# Altium PCB zhernakov_pwron_circuit.PcbDoc (part 1 of 2)
Units mm, origin at the board's own origin, x right, y up, seen from the top; angles counter-clockwise.
Board outline 108 x 46 mm, 2 copper layers (Top Layer, Bottom Layer), stack 1.57 mm thick; 57 components, 33 nets, 171 pads, 151 vias.
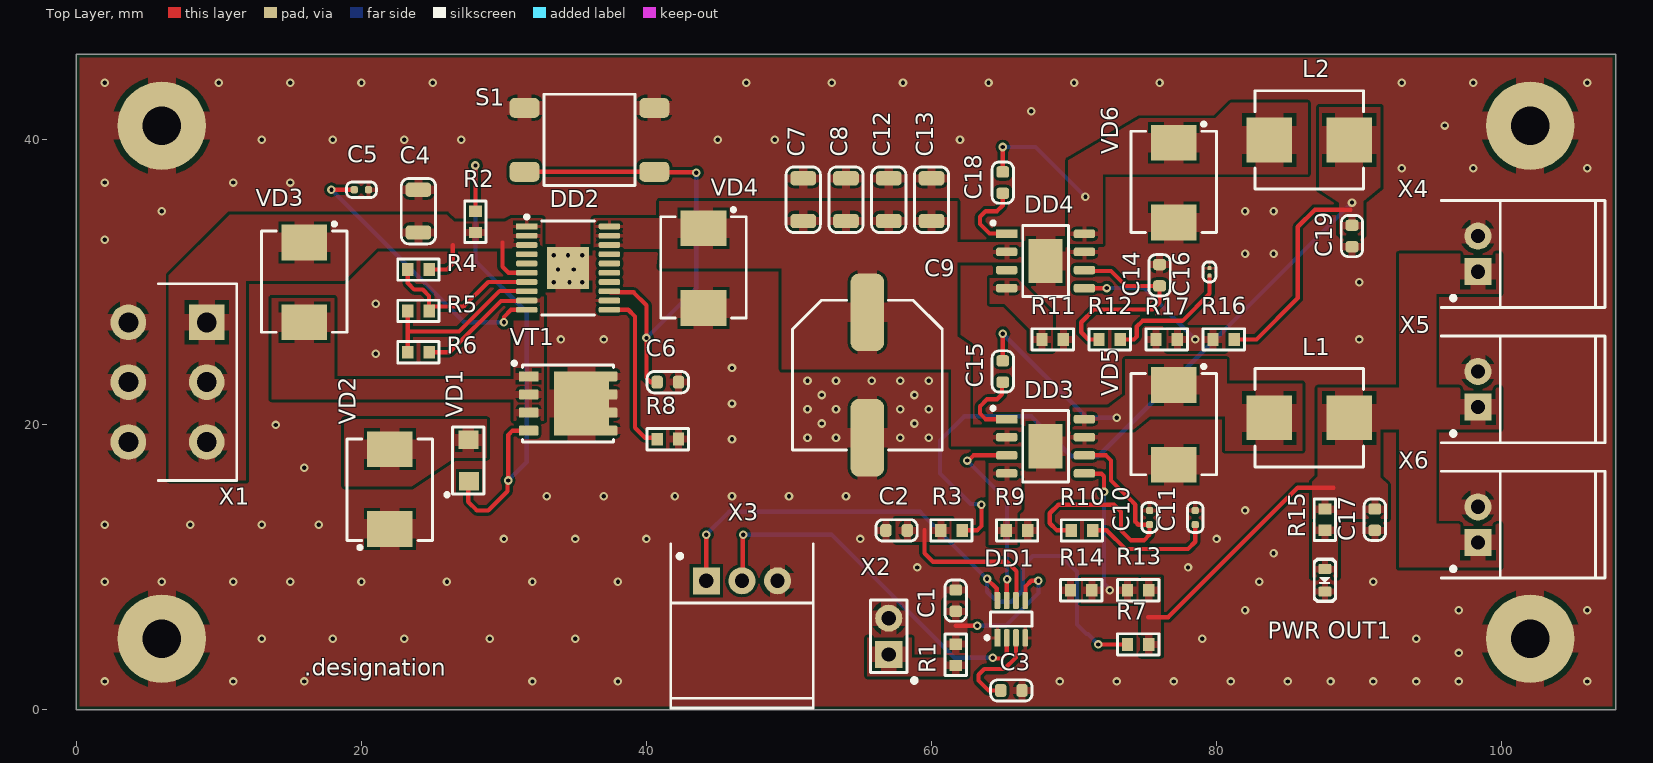
[diagram p0: Top Layer view]
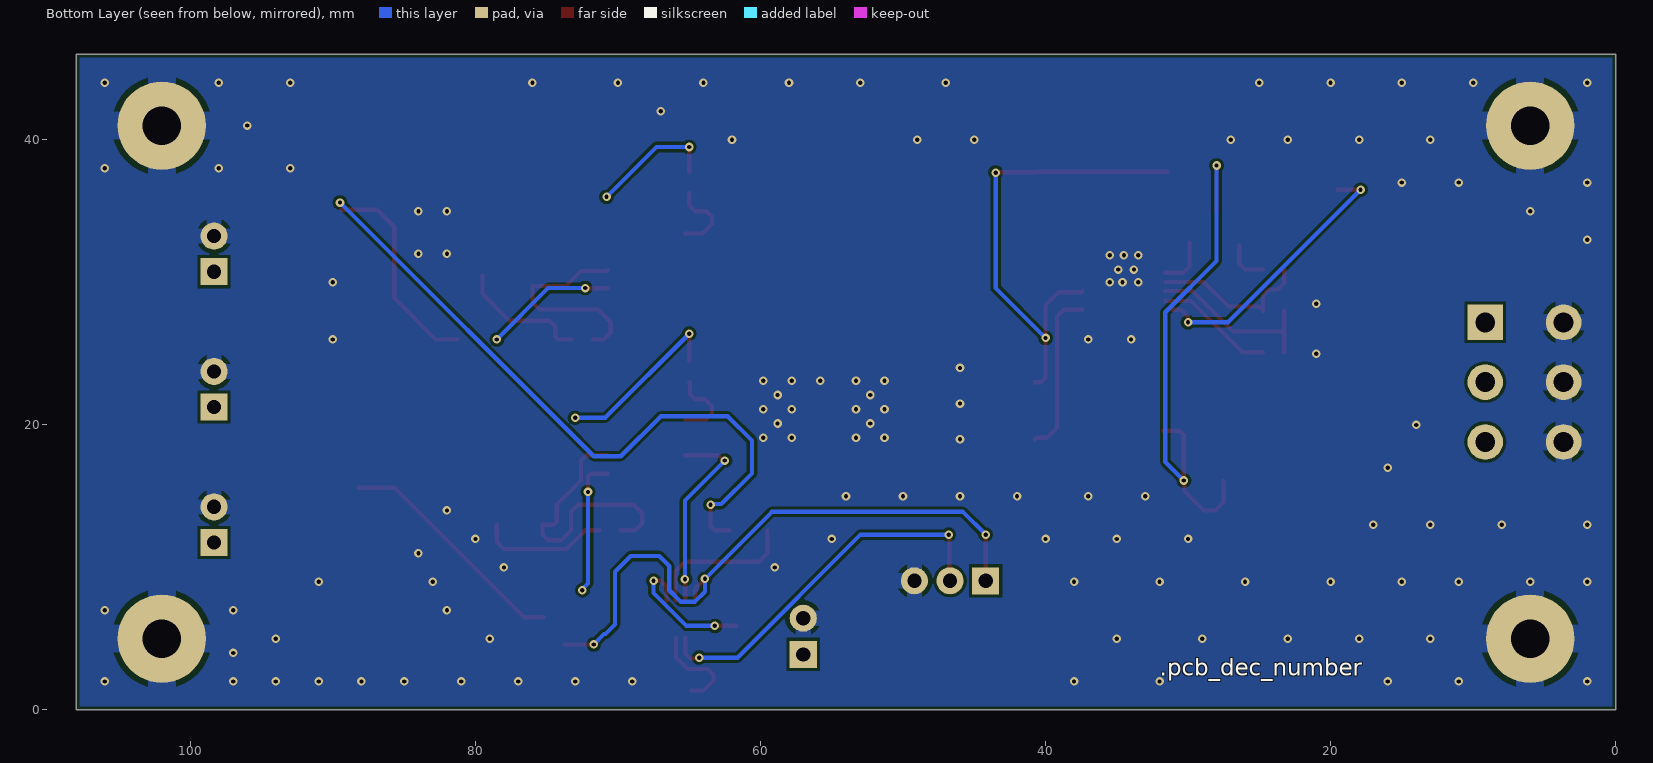
[diagram p1: Bottom Layer view, seen from below]
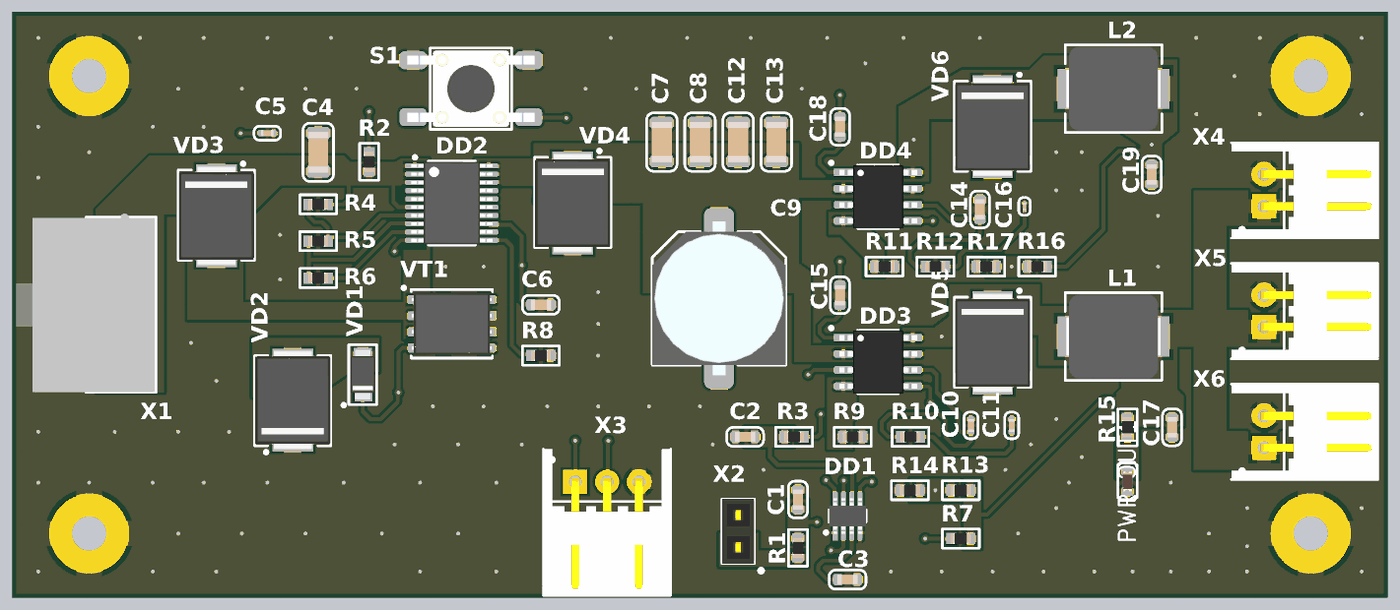
[diagram p2: 3D render of the assembled board from above, using the file's embedded part models]

## Layer stack, top to bottom
Top Solder: solder mask 0.0102, Solder Resist, Dk 3.5
Top Layer: signal copper 0.035
Core 1: core 1.5, FR4, Dk 4.6
Bottom Layer: signal copper 0.035
Bottom Solder: solder mask 0.0102, Solder Resist, Dk 3.5

## Board outline
0,0 108,0 108,46 0,46

## Design rules (kind name [scope] priority, off if disabled: settings)
AcuteAngle min_acute_angle [OnCopper] p1: minimum=3.50000000000000E+0001 checktracksonly=FALSE // Минимальный угол между примитивами топологии
BoardOutlineClearance board_outline_clearance_std [NOT (OnLayer('Bottom Overlay') OR OnLayer('Top Overlay'))] p1: gap=0.25 ignorepadtopadclearanceinfootprint=FALSE except(0: Arc-SplitContinuation Track-SplitContinuation SMDPad-SplitContinuation THPad-SplitContinuation Via-SplitContinuation Fill-SplitContinuation Poly-SplitContinuation Region-SplitContinuation Text-SplitContinuation) // Отступ элементов топологии от края фрезеруемой печатной платы
Clearance clearance_outer_35um_std [OnTopLayer OR OnBottomLayer] p1: gap=0.2 ignorepadtopadclearanceinfootprint=TRUE except(0.25: Arc-Hole Track-Hole SMDPad-Hole THPad-Hole Via-Hole Fill-Hole Poly-Hole Region-Hole Text-Hole) // Зазоры на внешних слоях
Clearance clearance_inner_35um_std [NOT (OnTopLayer Or OnBottomLayer)] p2: gap=0.2 ignorepadtopadclearanceinfootprint=FALSE except(0.25: Arc-Hole Track-Hole SMDPad-Hole THPad-Hole Via-Hole Fill-Hole Poly-Hole Region-Hole Text-Hole) // Зазоры на внутренних слоях
ComponentClearance [All] p1: gap=0 collisioncheckmode=3 verticalgap=0 showdistances=FALSE
DiffPairsRouting diff_pairs_routing [All] p1: maxlimit=0.127 minlimit=0.127 mostfreqgap=0.127 toplayer_minwidth=0.143 toplayer_maxwidth=0.143 toplayer_prefwidth=0.143 bottomlayer_minwidth=0.143 bottomlayer_maxwidth=0.143 bottomlayer_prefwidth=0.143 impedanceprofiledriven=TRUE impedanceprofileid={FD46899E-B5A2-4EF5-A302-5D2DB6A51F35} maxuncoupledlength=12.7 // Правила трассировки дифференциальных пар
HoleSize min_hole_size_std [IsPad] p1: absolutevalues=TRUE maxlimit=5.9 minlimit=0.6 maxpercent=80.000 minpercent=20.000 // Диаметр межслойного переходного отверстия
HoleSize min_hole_size_via_std [IsVia] p2: absolutevalues=TRUE maxlimit=5.9 minlimit=0.3 maxpercent=80.000 minpercent=20.000 // Минимальный диаметр монтажного отверстия
HoleToHoleClearance hole_to_hole_clearance_std [All] p1: gap=0.2 allowstackedmicrovias=FALSE // Минимальное расстояние между краями двух отверстий
MinimumAnnularRing min_via_ar_std [All] p1: minimumring=0.15 // Поясок площадки переходного отверстия (Annular ring VIA)
MinimumAnnularRing min_pad_ar_std [All] p2: minimumring=0.2 // Поясок монтажной контактной площадки (Annular ring PAD)
MinimumSolderMaskSliver min_solder_mask_bridge_std [All] p1: minsoldermaskwidth=0.15 // Мнимальная ширина масочного мостика
PlaneClearance plane_clearance_35um_std [All] p1: clearance=0.2 // Отступ полигона (для слоя plane) от элементов топологии
PlaneConnect [All] p1: planeconnectstyle=Relief reliefexpansion=0.5 reliefentries=4 reliefconductorwidth=0.2 reliefairgap=0.2
PolygonConnect poly_connect_to_pad<=0.3 [(AsMM(PadXSize_AllLayers)<=0.301) or (AsMM(PadYSize_AllLayers)<=0.301)] p1: thpad.connectstyle=Relief thpad.reliefconductorwidth=0.2 thpad.reliefentries=4 thpad.polygonreliefangle="90 Angle" thpad.airgapwidth=0.2 smdpad.connectstyle=Relief smdpad.reliefconductorwidth=0.2 smdpad.reliefentries=4 smdpad.polygonreliefangle="90 Angle" smdpad.airgapwidth=0.2 via.connectstyle=Direct via.reliefconductorwidth=0.254 via.reliefentries=4 via.polygonreliefangle="90 Angle" via.airgapwidth=0.254 // Правила подключения полигонов для падов от 0,3мм и меньше
PolygonConnect poly_connect_to_pad<=0.4 [(AsMM(PadXSize_AllLayers)<=0.401) or (AsMM(PadYSize_AllLayers)<=0.401)] p2: thpad.connectstyle=Relief thpad.reliefconductorwidth=0.26 thpad.reliefentries=4 thpad.polygonreliefangle="90 Angle" thpad.airgapwidth=0.2 smdpad.connectstyle=Relief smdpad.reliefconductorwidth=0.26 smdpad.reliefentries=4 smdpad.polygonreliefangle="90 Angle" smdpad.airgapwidth=0.2 via.connectstyle=Direct via.reliefconductorwidth=0.254 via.reliefentries=4 via.polygonreliefangle="90 Angle" via.airgapwidth=0.254 // Правила подключения полигонов для падов от 0,4 и меньше
PolygonConnect poly_connect_to_pad<=0.6 [(AsMM(PadXSize_AllLayers)<=0.601) or (AsMM(PadYSize_AllLayers)<=0.601)] p3: thpad.connectstyle=Relief thpad.reliefconductorwidth=0.33 thpad.reliefentries=4 thpad.polygonreliefangle="90 Angle" thpad.airgapwidth=0.2 smdpad.connectstyle=Relief smdpad.reliefconductorwidth=0.33 smdpad.reliefentries=4 smdpad.polygonreliefangle="90 Angle" smdpad.airgapwidth=0.2 via.connectstyle=Direct via.reliefconductorwidth=0.254 via.reliefentries=4 via.polygonreliefangle="90 Angle" via.airgapwidth=0.254 // Правила подключения полигонов для падов от 0,6мм и меньше
PolygonConnect poly_connect_to_pad<=0.7 [(AsMM(PadXSize_AllLayers)<=0.701) or (AsMM(PadYSize_AllLayers)<=0.701)] p4: thpad.connectstyle=Relief thpad.reliefconductorwidth=0.46 thpad.reliefentries=4 thpad.polygonreliefangle="90 Angle" thpad.airgapwidth=0.2 smdpad.connectstyle=Relief smdpad.reliefconductorwidth=0.46 smdpad.reliefentries=4 smdpad.polygonreliefangle="90 Angle" smdpad.airgapwidth=0.2 via.connectstyle=Direct via.reliefconductorwidth=0.254 via.reliefentries=4 via.polygonreliefangle="90 Angle" via.airgapwidth=0.254 // Правила подключения полигонов для падов от 0,7мм и меньше
PolygonConnect poly_connect_to_pad<=0.8 [(AsMM(PadXSize_AllLayers)<=0.8)or(AsMM(PadYSize_AllLayers)<=0.8)] p5: thpad.connectstyle=Relief thpad.reliefconductorwidth=0.53 thpad.reliefentries=4 thpad.polygonreliefangle="90 Angle" thpad.airgapwidth=0.3 smdpad.connectstyle=Relief smdpad.reliefconductorwidth=0.53 smdpad.reliefentries=4 smdpad.polygonreliefangle="90 Angle" smdpad.airgapwidth=0.2 via.connectstyle=Direct via.reliefconductorwidth=0.254 via.reliefentries=4 via.polygonreliefangle="90 Angle" via.airgapwidth=0.254 // Правила подключения полигонов для падов от 0,8мм и меньше
PolygonConnect poly_connect_to_pad<=1 [(AsMM(PadXSize_AllLayers)<=1.01)or(AsMM(PadYSize_AllLayers)<=1.01)] p6: thpad.connectstyle=Relief thpad.reliefconductorwidth=0.6 thpad.reliefentries=4 thpad.polygonreliefangle="90 Angle" thpad.airgapwidth=0.3 smdpad.connectstyle=Relief smdpad.reliefconductorwidth=0.6 smdpad.reliefentries=4 smdpad.polygonreliefangle="90 Angle" smdpad.airgapwidth=0.2 via.connectstyle=Direct via.reliefconductorwidth=0.254 via.reliefentries=4 via.polygonreliefangle="90 Angle" via.airgapwidth=0.254 // Правила подключения полигонов для падов от 1мм и меньше
PolygonConnect poly_connect_to_pad<=1.3 [(AsMM(PadXSize_AllLayers)<=1.31)or(AsMM(PadYSize_AllLayers)<=1.31)] p7: thpad.connectstyle=Relief thpad.reliefconductorwidth=0.66 thpad.reliefentries=4 thpad.polygonreliefangle="90 Angle" thpad.airgapwidth=0.3 smdpad.connectstyle=Relief smdpad.reliefconductorwidth=0.86 smdpad.reliefentries=4 smdpad.polygonreliefangle="90 Angle" smdpad.airgapwidth=0.2 via.connectstyle=Direct via.reliefconductorwidth=0.254 via.reliefentries=4 via.polygonreliefangle="90 Angle" via.airgapwidth=0.254 // Правила подключения полигонов для падов от 1,3мм и меньше
PolygonConnect poly_connect_to_pad<=1.6 [(AsMM(PadXSize_AllLayers)<=1.61)or(AsMM(PadYSize_AllLayers)<=1.61)] p8: thpad.connectstyle=Relief thpad.reliefconductorwidth=0.8 thpad.reliefentries=4 thpad.polygonreliefangle="90 Angle" thpad.airgapwidth=0.3 smdpad.connectstyle=Relief smdpad.reliefconductorwidth=1 smdpad.reliefentries=4 smdpad.polygonreliefangle="90 Angle" smdpad.airgapwidth=0.2 via.connectstyle=Direct via.reliefconductorwidth=0.254 via.reliefentries=4 via.polygonreliefangle="90 Angle" via.airgapwidth=0.254 // Правила подключения полигонов для падов от 1,6мм и меньше
PolygonConnect poly_connect_to_pad<=1.8 [(AsMM(PadXSize_AllLayers)<=1.8)or(AsMM(PadYSize_AllLayers)<=1.8)] p9: thpad.connectstyle=Relief thpad.reliefconductorwidth=1 thpad.reliefentries=4 thpad.polygonreliefangle="90 Angle" thpad.airgapwidth=0.3 smdpad.connectstyle=Relief smdpad.reliefconductorwidth=1.2 smdpad.reliefentries=4 smdpad.polygonreliefangle="90 Angle" smdpad.airgapwidth=0.2 via.connectstyle=Direct via.reliefconductorwidth=0.254 via.reliefentries=4 via.polygonreliefangle="90 Angle" via.airgapwidth=0.254 // Правила подключения полигонов для падов от 1,8мм и меньше
PolygonConnect poly_connect_to_pad<=2 [(AsMM(PadXSize_AllLayers)<=2.01)or(AsMM(PadYSize_AllLayers)<=2.01)] p10: thpad.connectstyle=Relief thpad.reliefconductorwidth=1.1 thpad.reliefentries=4 thpad.polygonreliefangle="90 Angle" thpad.airgapwidth=0.3 smdpad.connectstyle=Relief smdpad.reliefconductorwidth=1.4 smdpad.reliefentries=4 smdpad.polygonreliefangle="90 Angle" smdpad.airgapwidth=0.2 via.connectstyle=Direct via.reliefconductorwidth=0.254 via.reliefentries=4 via.polygonreliefangle="90 Angle" via.airgapwidth=0.254 // Правила подключения полигонов для падов от 2мм и меньше
PolygonConnect poly_connect_to_pad<=2.3 [(AsMM(PadXSize_AllLayers)<=2.31)or(AsMM(PadYSize_AllLayers)<=2.31)] p11: thpad.connectstyle=Relief thpad.reliefconductorwidth=1.2 thpad.reliefentries=4 thpad.polygonreliefangle="90 Angle" thpad.airgapwidth=0.3 smdpad.connectstyle=Relief smdpad.reliefconductorwidth=1.4 smdpad.reliefentries=4 smdpad.polygonreliefangle="90 Angle" smdpad.airgapwidth=0.2 via.connectstyle=Direct via.reliefconductorwidth=0.254 via.reliefentries=4 via.polygonreliefangle="90 Angle" via.airgapwidth=0.254 // Правила подключения полигонов для падов от 2,3мм и меньше
PolygonConnect poly_connect_to_pad<=2.5 [(AsMM(PadXSize_AllLayers)<=2.51)or(AsMM(PadYSize_AllLayers)<=2.51)] p12: thpad.connectstyle=Relief thpad.reliefconductorwidth=1.2 thpad.reliefentries=4 thpad.polygonreliefangle="90 Angle" thpad.airgapwidth=0.3 smdpad.connectstyle=Relief smdpad.reliefconductorwidth=1.4 smdpad.reliefentries=4 smdpad.polygonreliefangle="90 Angle" smdpad.airgapwidth=0.2 via.connectstyle=Direct via.reliefconductorwidth=0.254 via.reliefentries=4 via.polygonreliefangle="90 Angle" via.airgapwidth=0.254 // Правила подключения полигонов для падов от 2,5мм и меньше
PolygonConnect poly_connect_to_pad<=2.7 [(AsMM(PadXSize_AllLayers)<=2.71)or(AsMM(PadYSize_AllLayers)<=2.71)] p13: thpad.connectstyle=Relief thpad.reliefconductorwidth=1.4 thpad.reliefentries=4 thpad.polygonreliefangle="90 Angle" thpad.airgapwidth=0.3 smdpad.connectstyle=Relief smdpad.reliefconductorwidth=1.6 smdpad.reliefentries=4 smdpad.polygonreliefangle="90 Angle" smdpad.airgapwidth=0.2 via.connectstyle=Direct via.reliefconductorwidth=0.254 via.reliefentries=4 via.polygonreliefangle="90 Angle" via.airgapwidth=0.254 // Правила подключения полигонов для падов от 2,7мм и меньше
PolygonConnect poly_connect_to_pad<=3 [(AsMM(PadXSize_AllLayers)<=3.01)or(AsMM(PadYSize_AllLayers)<=3.01)] p14: thpad.connectstyle=Relief thpad.reliefconductorwidth=1.6 thpad.reliefentries=4 thpad.polygonreliefangle="90 Angle" thpad.airgapwidth=0.3 smdpad.connectstyle=Relief smdpad.reliefconductorwidth=1.8 smdpad.reliefentries=4 smdpad.polygonreliefangle="90 Angle" smdpad.airgapwidth=0.2 via.connectstyle=Direct via.reliefconductorwidth=0.254 via.reliefentries=4 via.polygonreliefangle="90 Angle" via.airgapwidth=0.254 // Правила подключения полигонов для падов от 3мм и меньше
PolygonConnect poly_connect_to_pad<=7 [(AsMM(PadXSize_AllLayers)<7.01)or(AsMM(PadYSize_AllLayers)<=7.01)] p15: thpad.connectstyle=Relief thpad.reliefconductorwidth=2 thpad.reliefentries=4 thpad.polygonreliefangle="90 Angle" thpad.airgapwidth=0.4 smdpad.connectstyle=Relief smdpad.reliefconductorwidth=2 smdpad.reliefentries=4 smdpad.polygonreliefangle="90 Angle" smdpad.airgapwidth=0.3 via.connectstyle=Direct via.reliefconductorwidth=0.254 via.reliefentries=4 via.polygonreliefangle="90 Angle" via.airgapwidth=0.254 // Правила подключения полигонов для падов от 7мм и меньше
PolygonConnect poly_connect_to_pad [All] p16: thpad.connectstyle=Relief thpad.reliefconductorwidth=0.25 thpad.reliefentries=4 thpad.polygonreliefangle="90 Angle" thpad.airgapwidth=0.2 smdpad.connectstyle=Relief smdpad.reliefconductorwidth=0.25 smdpad.reliefentries=4 smdpad.polygonreliefangle="90 Angle" smdpad.airgapwidth=0.2 via.connectstyle=Direct via.reliefconductorwidth=0.25 via.reliefentries=4 via.polygonreliefangle="90 Angle" via.airgapwidth=0.2 // Правила подключения полигонов общие
RoutingCorners [All] p1 off: cornerstyle=45-Degree minsetback=2.5 maxsetback=2.5
RoutingVias [All] p1: holewidth=0.3 width=0.6 viastyle="Through Hole" minholewidth=0.3 minwidth=0.6 maxholewidth=5.9 maxwidth=6.4
SilkToSilkClearance silk_to_silk_clearance_std [All] p1 off: silktosilkclearance=0.15 // Отступ текста шелкографии от других примитивов шелкографии
SilkToSolderMaskClearance silk_to_solder_mask_clearance_std [IsPad] p1 off: minsilkscreentomaskgap=0.15 clearancetoexposedcopper=FALSE // Минимальное расстояние между элементами шелкографии и вскрытой медью
SolderMaskExpansion solder_mask_expansion_std [All] p1: expansion=0.05 // Припуск паяльной масски
UnRoutedNet [All] p1: checkbadconnections=TRUE
Width width_35um_std [All] p1: maxlimit=10 minlimit=0.2 preferedwidth=0.2 checkconnectedcopper=TRUE // Ширина проводников (общая)
19 further rules are at their usual default settings.

## Components (designator, comment, footprint, x,y, rotation, side; value= is the part's Value field where it differs from the comment)
C1 "0,1 мк" C0603 61.7,7.67 r90 top
C2 "0,01 мк" C0603 57.55,12.6 r180 top
C3 "0,22 мк" C0603 65.6,1.37 r0 top
C4 "1 мк" C1206 24,35 r90 top
C5 "8200" C0402 20,36.5 r0 top
C6 "0,1 мк" C0603 41.5,23 r0 top
C7 "2,2 мк" C1206 51,35.8 r90 top
C8 "2,2 мк" C1206 54,35.8 r90 top
C9 "47 мк" CAPAE-1000X1000X1200 55.5,23.5 r270 top
C10 "75" C0402 75.3,13.5 r90 top
C11 "1800" C0402 78.5,13.5 r90 top
C12 "2,2 мк" C1206 57,35.8 r90 top
C13 "2,2 мк" C1206 60,35.8 r90 top
C14 "220" C0603 76,30.5 r90 top
C15 "0,1 мк" C0603 65,23.75 r90 top
C16 "2200" C0201 79.5,30.735 r90 top
C17 "0,47 мк" C0603 91.1,13.35 r270 top
C18 "0,1 мк" C0603 65,37 r90 top
C19 "0,47 мк" C0603 89.5,33.25 r270 top
DD1 "LTC2955ITS8-1#TRMPBF" SOT-23-8-P65-290X280X100 65.6,6.37 r90 top
DD2 "TPS16630PWPR" HTSSOP-20-P65-650X440X120-L63X25-T296X296 34.5,31 r0 top
DD3 "TPS54360BDDA" HSOIC-8-P127-490X390X170-L84X41-T310X240 68,18.5 r0 top
DD4 "TPS54360BDDA" HSOIC-8-P127-490X390X170-L84X41-T310X240 68,31.5 r0 top
L1 "SRP7028A-220M" SRP-2-730X660X280 86.5,20.5 r0 top
L2 "SRP7028A-220M" SRP-2-730X660X280 86.5,40 r0 top
"PWR OUT1" "TLMS1000-GS08" HL0603 87.6,9.1 r90 top
R1 "5,1 к" R0603 61.7,3.87 r270 top
R2 "620" R0603 28,34.25 r270 top
R3 "1 к" R0603 61.4,12.6 r180 top
R4 "750 к" R0603 24,30.9 r0 top
R5 "13 к" R0603 24,28 r0 top
R6 "33 к" R0603 24,25.1 r180 top
R7 "47 к" R0603 74.5,4.6 r0 top
R8 "5,1 к" R0603 41.5,19 r0 top
R9 "47" R0603 66,12.6 r180 top
R10 "2,2 к" R0603 70.55,12.6 r180 top
R11 "62 к" R0603 68.5,26 r180 top
R12 "1 к" R0603 72.5,26 r180 top
R13 "150" R0603 74.5,8.4 r0 top
R14 "10,2 к" R0603 70.5,8.4 r0 top
R15 "680" R0603 87.6,13.35 r90 top
R16 "53,6 к" R0603 80.5,26 r0 top
R17 "10,2 к" R0603 76.5,26 r0 top
S1 "FSM4JSMA" FSM4JSMA 36,40 r0 top
VD1 "BZD17C15P" DO-219AB-280X180X108 27.5,17.5 r90 top
VD2 "SS36-E3/57T" DO-214AB-790X590X262 22,15.5 r90 top
VD3 "1.5SMC62CA" DO-214AB-790X590X262 16,30 r270 top
VD4 "SS36-E3/57T" DO-214AB-790X590X262 44,31 r270 top
VD5 "SS36-E3/57T" DO-214AB-790X590X262 77,20 r270 top
VD6 "SS36-E3/57T" DO-214AB-790X590X262 77,37 r270 top
VT1 "CSD19532Q5BT" VSONP-8-P127-600X500X105 34.5,21.5 r270 top
X1 "4-1775099-1" 4-1775099-1 6.5,23 r270 top
X2 "DS1023-1x2SF11" DS1023-1X2SF11 57,5.17 r90 top
X3 "DS1069-3MRW6XA" DS1069-3MRW6XA 46.7,5.9 r0 top
X4 "DS1069-2MRW6XA" DS1069-2MRW6XA 101.5,32 r90 top
X5 "DS1069-2MRW6XA" DS1069-2MRW6XA 101.5,22.5 r90 top
X6 "DS1069-2MRW6XA" DS1069-2MRW6XA 101.5,13 r90 top

## Footprints (in the part's own frame and the unit in brackets; to place one, negate y for a bottom-side part, rotate by r counter-clockwise, add the part's x,y. Pads: shape width x height; smd on the part's side, far side on the other; paste and mask are expansions set on the pad)
4-1775099-1 [mm] "ATX Power 6 Pins Mount Header, V/A Type"
  rect 2.5x2.5 hole 1.4: 1(-4.2,2.65)
  round 2.5 hole 1.4: 2(0,2.65) 3(4.2,2.65) 4(-4.2,-2.85) 5(0,-2.85) 6(4.2,-2.85)
  silkscreen extent -6.9,-0.75 6.9,4.75, body extent -7.18,-6.25 6.88,4.65, height 12.8
C0201 [mm] "Chip Capacitor, 2-Leads, Body 0,60x0,30mm, IPC Medium Density"
  rrect50% 0.28x0.3 smd: 1(-0.265,0) 2(0.265,0)
  silkscreen extent -0.7,-0.45 0.7,0.45, body extent -0.3,-0.15 0.3,0.15, height 0.29
C0402 [mm] "Chip Capacitor, 2-Leads, Body 1,00x0,50mm, IPC Medium Density"
  rrect50% 0.5x0.5 smd: 1(-0.5,0) 2(0.5,0)
  silkscreen extent -1.05,-0.55 1.05,0.55, body extent -0.5,-0.25 0.5,0.25, height 0.5
C0603 [mm] "Chip Capacitor, 2-Leads, Body 1,60x0,80mm, IPC Medium Density"
  rrect50% 0.8x0.9 smd: 1(-0.75,0) 2(0.75,0)
  silkscreen extent -1.45,-0.75 1.45,0.75, body extent -0.8,-0.4 0.8,0.4, height 0.8
C1206 [mm] "Chip Capacitor, 2-Leads, Body 3,20x1,60mm, IPC Medium Density"
  rrect50% 1x1.8 smd: 1(-1.5,0) 2(1.5,0)
  silkscreen extent -2.3,-1.2 2.3,1.2, body extent -1.6,-0.8 1.6,0.8, height 0.78
CAPAE-1000X1000X1200 [mm] "Aluminum Electrolytic Capacitor, Body 10,50x10,50x12,50mm, IPC Low Density"
  rrect50% 5.45x2.35 smd: 1(-4.4,0) 2(4.4,0)
  silkscreen extent -5.25,-5.25 5.25,5.25, body extent -6.05,-5.25 6.05,5.25, height 12.5
DO-214AB-790X590X262 [mm] "Molded Diode, 2-Leads, Body 7,90x5,90mm, IPC Medium Density"
  rect 2.5x3.2 smd: 1(-2.8,0) 2(2.8,0)
  silkscreen extent -4.22,-3 3.5,3, body extent -3.95,-2.95 3.95,2.95, height 2.59
DO-219AB-280X180X108 [mm] "Molded Diode, 2-Leads, Body 2,80x1,80mm, IPC Medium Density"
  rect 1.3x1.4 smd: 1(-1.45,-0.05) 2(1.45,0)
  silkscreen extent -2.45,-1.1 2.35,1.55, body extent -1.95,-0.95 1.95,0.95, height 1.25
DS1023-1X2SF11 [mm] "PBS 2 Pins 2,54mm Socket Header V/T Blanking Type"
  rect 1.9x1.9 hole 1: 1(-1.27,0)
  round 1.9 hole 1: 2(1.27,0)
  silkscreen extent -3.1,-1.8 2.55,1.28, body extent -2.54,-1.27 2.54,1.27, height 8.5
DS1069-2MRW6XA [mm] "CWF 2 Pins Plug Header, Pitch 2,5mm, R/A Type, Type A"
  rect 1.9x1.9 hole 1: 1(-1.249,3.163)
  round 1.9 hole 1: 2(1.251,3.163)
  silkscreen extent -3.75,-5.76 3.75,5.74, body extent -3.75,-5.76 3.75,5.74, height 5.85
DS1069-3MRW6XA [mm] "CWF 3 Pins Plug Header, Pitch 2,5mm, R/A Type, Type A"
  rect 1.9x1.9 hole 1: 1(-2.5,3.164)
  round 1.9 hole 1: 2(0,3.164) 3(2.5,3.164)
  silkscreen extent -5,-5.76 5,5.74, body extent -5,-5.76 5,5.74, height 5.85
FSM4JSMA [mm]
  rrect50% 2.1x1.4 smd: 1(-4.55,2.24) 1(4.55,2.24) 2(-4.55,-2.24) 2(4.55,-2.24)
  silkscreen extent -3.2,-3.2 3.2,3.2, body extent -5,-3 5,3, height 5.13
HL0603 [mm] "Chip Resistor, 2-Leads, Body 1,60x0,80mm, IPC Medium Density"
  rrect25% 0.7x0.9 smd: 1(-0.8,0) 2(0.8,0)
  silkscreen extent -1.5,-0.75 1.5,0.75, body extent -0.81,-0.4 0.81,0.4, height 0.64
HSOIC-8-P127-490X390X170-L84X41-T310X240 [mm] "SOIC, 8-Leads, Body 4,90x3,90mm, Pitch 1,27mm, Thermal Pad 3,10x2,40mm, IPC Medium Density"
  rect 2.4x3.1 smd: 0(0,0)
  rect 1.5x0.6 smd: 1(-2.725,1.905)
  rrect50% 1.5x0.6 smd: 2(-2.725,0.635) 3(-2.725,-0.635) 4(-2.725,-1.905) 5(2.725,-1.905) 6(2.725,-0.635) 7(2.725,0.635) 8(2.725,1.905)
  silkscreen extent -3.81,-2.5 1.6,2.79, body extent -3.06,-2.47 3.06,2.48, height 1.7
HTSSOP-20-P65-650X440X120-L63X25-T296X296 [mm] "TSOP, 20-Leads, Body 6,50x4,40mm, Pitch 0,65mm, Thermal Pad 2.96x2.96mm, IPC Medium Density"
  rect 2.96x2.96 smd: 0(0,0)
  rect 1.5x0.4 smd: 1(-2.9,2.925)
  rrect50% 1.5x0.4 smd: 2(-2.9,2.275) 3(-2.9,1.625) 4(-2.9,0.975) 5(-2.9,0.325) 6(-2.9,-0.325) 7(-2.9,-0.975) 8(-2.9,-1.625) 9(-2.9,-2.275) 10(-2.9,-2.925) 11(2.9,-2.925) 12(2.9,-2.275) 13(2.9,-1.625) 14(2.9,-0.975) 15(2.9,-0.325) 16(2.9,0.325) 17(2.9,0.975) 18(2.9,1.625) 19(2.9,2.275) 20(2.9,2.925)
  silkscreen extent -3.02,-3.3 1.85,3.72, body extent -3.2,-3.25 3.2,3.25, height 1.13
R0603 [mm] "Chip Resistor, 2-Leads, Body 1,60x0,80mm, IPC Medium Density"
  rect 0.8x0.9 smd: 1(-0.75,0) 2(0.75,0)
  silkscreen extent -1.45,-0.75 1.45,0.75, body extent -0.77,-0.43 0.78,0.43, height 0.43
SOT-23-8-P65-290X280X100 [mm] "SOT, 8-Leads, Body 2,90x2,80mm, Pitch 0,65mm, IPC Medium Density"
  rect 1.22x0.4 smd: 1(-1.31,0.975)
  rrect50% 1.22x0.4 smd: 2(-1.31,0.325) 3(-1.31,-0.325) 4(-1.31,-0.975) 5(1.31,-0.975) 6(1.31,-0.325) 7(1.31,0.325) 8(1.31,0.975)
  silkscreen extent -1.42,-1.45 0.5,1.82, body extent -1.4,-1.45 1.4,1.45, height 1
SRP-2-730X660X280 [mm] "Precision Wire Wound Inductor, 2-Leads, Body 7,30x6,60mm, IPC Medium Density"
  rect 3.2x3.15 smd: 1(-2.8,0) 2(2.8,0)
  silkscreen extent -3.8,-3.45 3.8,3.45, body extent -3.7,-3.3 3.7,3.3, height 3
VSONP-8-P127-600X500X105 [mm] "VSONP, 8-Leads, Body 6,00x5,00mm, Pitch 1,27mm, Thermal Pad 4,44x4,52mm,IPC Medium Density"
  rrect25% 0.71x1.372 smd paste-10: D(-1.905,2.77) D(-0.635,2.77) D(0.635,2.77) D(1.905,2.77)
  rect 4.52x3.85 smd paste-10: D(0,0.95)
  rrect25% 0.71x1.372 smd paste-0.002: G(1.905,-2.77) S(-0.635,-2.77) S(0.635,-2.77)
  rect 0.71x1.372 smd paste-0.002: S(-1.905,-2.77)
  silkscreen extent -2.83,-3.78 2.7,3.2, body extent -2.45,-3.13 2.45,3.13, height 1.15

## Part data
C1 C15 C18: library part c0088, "=Описание", HelpURL=https://www.yageo.com/upload/media/product/productsearch/datasheet/mlcc/UPY-GPHC_X7R_6.3V-to-50V_20.pdf, ID=c0088, Корпус=0603, Наименование=CC0603KRX7R9BB104, Напряжение="50 В", Номинал="0,1 мк", Номинальное напряжение="50 В", Описание="Конденсатор керамический чип 0603 100 нФ 50 В ±10 %", Отклонение="±10 %", Производитель="YAGEO Corp.", Рабочие температуры="от –55 °С до +125 °С", Температурный коэффициент емкости=X7R, Фамилия=Паньков
C2: library part c0058, "=Описание", HelpURL=https://www.yageo.com/upload/media/product/productsearch/datasheet/mlcc/UPY-GPHC_X7R_6.3V-to-50V_20.pdf, ID=c0058, Корпус=0603, Наименование=CC0603KRX7R9BB103, Напряжение="50 В", Номинал="0,01 мк", Номинальное напряжение="50 В", Описание="Конденсатор керамический чип 0603 10 нФ 50 В ±10 %", Отклонение="±10 %", Производитель="YAGEO Corp.", Рабочие температуры="от –55 °С до +125 °С", Температурный коэффициент емкости=X7R, Фамилия=Паньков
C3: library part c0098, "=Описание", HelpURL=https://www.yageo.com/upload/media/product/productsearch/datasheet/mlcc/UPY-GPHC_X5R_4V-to-50V_26.pdf, ID=c0098, Корпус=0603, Наименование=CC0603KRX5R9BB224, Напряжение="50 В", Номинал="0,22 мк", Номинальное напряжение="50 В", Описание="Конденсатор керамический чип 0603 220 нФ 50 В ±10 %", Отклонение="±10 %", Производитель="YAGEO Corp.", Рабочие температуры="от –55 °С до +85 °С", Температурный коэффициент емкости=X5R, Фамилия=Паньков
C4: library part c0120, "=Описание", HelpURL=https://www.yageo.com/upload/media/product/productsearch/datasheet/mlcc/UPY-NP0X7R_MV_100-to-630V_22.pdf, ID=c0120, Корпус=1206, Наименование=CC1206KKX7R0BB105, Напряжение="100 В", Номинал="1 мк", Номинальное напряжение="100 В", Описание="Конденсатор керамический чип 1206 1 мкФ 100 В ±10 %", Отклонение="±10 %", Производитель="YAGEO Corp.", Рабочие температуры="от –55 °С до +125 °С", Температурный коэффициент емкости=X7R, Фамилия=Ларионов
C5: library part c0009, "=Описание", HelpURL=http://product.samsungsem.com/mlcc/CL05B822KB5NNN.do, ID=c0009, Корпус=0402, Наименование=CL05B822KB5NNNC, Напряжение="50 В", Номинал=8200, Номинальное напряжение="50 В", Описание="Конденсатор керамический чип 0402 8,2 нФ 50 В ±10 %", Отклонение="±10 %", Производитель="Samsung Electro-Mechanics", Рабочие температуры="от –55 °С до +125 °С", Температурный коэффициент емкости=X7R, Фамилия=Жернаков
C6: library part c0089, "=Описание", HelpURL=https://www.yageo.com/upload/media/product/productsearch/datasheet/mlcc/UPY-NP0X7R_MV_100-to-630V_22.pdf, ID=c0089, Корпус=0603, Наименование=CC0603KRX7R0BB104, Напряжение="100 В", Номинал="0,1 мк", Номинальное напряжение="100 В", Описание="Конденсатор керамический чип 0603 100 нФ 100 В ±10 %", Отклонение="±10 %", Производитель="YAGEO Corp.", Рабочие температуры="от –55 °С до +125 °С", Температурный коэффициент емкости=X7R, Фамилия=Ларионов
C7 C8 C12 C13: library part c0131, "=Описание", HelpURL=https://www.yageo.com/upload/media/product/productsearch/datasheet/mlcc/UPY-NP0X7R_MV_100-to-630V_22.pdf, ID=c0131, Корпус=1206, Наименование=CC1206KKX7R0BB225, Напряжение="100 В", Номинал="2,2 мк", Номинальное напряжение="100 В", Описание="Конденсатор керамический чип 1206 2,2 мкФ 100 В ±10 %", Отклонение="±10 %", Производитель="YAGEO Corp.", Рабочие температуры="от –55 °С до +125 °С", Температурный коэффициент емкости=X7R, Фамилия=Ларионов
C9: library part c0165, "=Описание", HelpURL=https://www.vishay.com/capacitors/list/product-28403/, ID=c0165, Корпус="CAPAE (10 x 10 x 12)", Наименование=MAL214699904E3, Напряжение="100 В", Номинал="47 мк", Номинальное напряжение="100 В", Описание="Конденсатор электролитический алюминиевый 47 мкФ 100 В ±20 %", Отклонение="±20 %", Производитель="Vishay Intertechnology, Inc.", Рабочие температуры="от –55 °С до +125 °С", Среднеквадратичный размах пульсации тока="0,23 А", Фамилия=Ларионов, Эквивалентное последовательное сопротивление="4,1 Ом"
C10: library part c0004, "=Описание", HelpURL=http://product.samsungsem.com/mlcc/CL05C750JB5NNN.do, ID=c0004, Корпус=0402, Наименование=CL05C750JB5NNNC, Напряжение="50 В", Номинал=75, Номинальное напряжение="50 В", Описание="Конденсатор керамический чип 0402 75 пФ 50 В ±5 %", Отклонение="±5 %", Производитель="Samsung Electro-Mechanics", Рабочие температуры="от –55 °С до +125 °С", Температурный коэффициент емкости=C0G, Фамилия=Жернаков
C11: library part c0007, "=Описание", HelpURL=http://product.samsungsem.com/mlcc/CL05B182KB5NNW.do, ID=c0007, Корпус=0402, Наименование=CL05B182KB5NNWC, Напряжение="50 В", Номинал=1800, Номинальное напряжение="50 В", Описание="Конденсатор керамический чип 0201 1,8 нФ 50 В ±10 %", Отклонение="±10 %", Производитель="Samsung Electro-Mechanics", Рабочие температуры="от –55 °С до +125 °С", Температурный коэффициент емкости=X7R, Фамилия=Жернаков
C14: library part c0029, "=Описание", HelpURL=https://www.yageo.com/upload/media/product/productsearch/datasheet/mlcc/UPY-GP_NP0_16V-to-50V_18.pdf, ID=c0029, Корпус=0603, Наименование=CC0603FRNPO8BN221, Напряжение="25 В", Номинал=220, Номинальное напряжение="25 В", Описание="Конденсатор керамический чип 0603 220 пФ 25 В ±1 %", Отклонение="±1 %", Производитель="YAGEO Corp.", Рабочие температуры="от –55 °С до +125 °С", Температурный коэффициент емкости=C0G, Фамилия=Паньков
C16: library part c0044, "=Описание", HelpURL=https://www.yageo.com/upload/media/product/productsearch/datasheet/mlcc/UPY-GPHC_X5R_4V-to-50V_26.pdf, ID=c0044, Корпус=0201, Наименование=CC0201KRX5R8BB222, Напряжение="25 В", Номинал=2200, Номинальное напряжение="25 В", Описание="Конденсатор керамический чип 0201 2,2 нФ 25 В ±10 %", Отклонение="±10 %", Производитель="YAGEO Corp.", Рабочие температуры="от –55 °С до +85 °С", Температурный коэффициент емкости=X5R, Фамилия=Паньков
C17 C19: library part c0104, "=Описание", HelpURL=https://www.yageo.com/upload/media/product/productsearch/datasheet/mlcc/UPY-GPHC_X5R_4V-to-50V_26.pdf, ID=c0104, Корпус=0603, Наименование=CC0603KRX5R7BB474, Напряжение="16 В", Номинал="0,47 мк", Номинальное напряжение="16 В", Описание="Конденсатор керамический чип 0603 470 нФ 16 В ±10 %", Отклонение="±10 %", Производитель="YAGEO Corp.", Рабочие температуры="от –55 °С до +85 °С", Температурный коэффициент емкости=X5R, Фамилия=Паньков
DD1: library part dd0008, "=Описание", HelpURL=https://www.analog.com/en/products/ltc2955.html, ID=dd0008, Корпус=SOT-23-8, Максимальное напряжение="36 В", Наименование=LTC2955ITS8-1#TRMPBF, Напряжение="от 1,5 В до 36 В", Описание="Контроллер включения/выключения", Производитель="Analog Devices, Inc.", Рабочие температуры="от –40 °С до +85 °С", Ток=—, Фамилия=Жернаков
DD2 DD3 DD4: library part dd0007, "=Описание", ID=dd0007, Производитель="Texas Instruments Inc.", Фамилия=Жернаков
  DD2: HelpURL=https://www.ti.com/product/TPS1663, Корпус=HTSSOP-20, Максимальное напряжение="67 В", Наименование=TPS16630PWPR, Напряжение="от 4,5 В до 60 В", Описание="Защитная микросхема eFuse 60 В и 6 А", Рабочие температуры="от –40 °С до +125 °С", Ток="от 0,6 А до 6 А"
  DD3 DD4: HelpURL=https://www.ti.com/product/TPS54360B, Входное напряжение="от 4,5 В до 60 В", Выходное напряжение="от 1,0 В до 58,8 В", Коммутируемый ток="до 3,5 А", Корпус=HSOIC-8, Наименование=TPS54360BDDA, Описание="Понижающий преобразователь напряжения 4,5…60 В / 1…58,8 В и 3,5 А", Рабочие температуры="от –40 °С до +150 °С", Частота переключения="от 100 кГц до 2,5 МГц"
L1 L2: library part l0013, "=Описание", HelpURL=https://www.bourns.com/products/magnetic-products/power-inductors-aec-q200-compliant/product/SRP7028A, ID=l0013, Индуктивность="22 мкГн", Корпус="7,3 x 6,6 x 2,8", Максимальное активное сопротивление="190 мОм", Наименование=SRP7028A-220M, Номинал="22 мкГн", Номинальное активное сопротивление="165 мОм", Номинальный ток (при нагреве на 20 °С/40 °С)="2 А", Описание="Катушка индуктивности 22 мкГн ±20 %", Отклонение="±20 %", Производитель="Bourns, Inc.", Рабочее напряжение="не указано", Рабочие температуры="от –55 °С до +150 °С", Резонансная частота="10 МГц", Ток насыщения="3,5 А", Фамилия=Ларионов
"PWR OUT1": library part hl0001, "=Описание", HelpURL=https://www.vishay.com/leds/list/product-83172/, ID=hl0001, Корпус=0603, Наименование=TLMS1000-GS08, Номинальная длина волны="628 нм", Номинальная сила света="4 мкд", Номинальное падение напряжения="1,8 В", Номинальный прямой ток="15 мА", Описание="Светодиод чип 0603 красный", Производитель="Vishay Intertechnology, Inc.", Рабочие температуры="от -40 °С до +100 °С", Рассеиваемая мощность="40 мВт", Фамилия=Ларионов, Цвет=Red
R1: library part r0096, "=Описание", HelpURL=https://www.yageo.com/upload/media/product/productsearch/datasheet/rchip/PYu-RC_Group_51_RoHS_L_11.pdf, ID=r0096, Корпус=0603, Наименование=RC0603FR-075K1L, Номинал="5,1 к", Номинальное напряжение="75 В", Номинальный ток="1 А", Описание="Резистор чип 0603 5,1 кОм ±1 % 0,1 Вт", Отклонение="±1 %", Примечание="Ряд E24", Производитель="YAGEO Corp.", Рабочие температуры="от –55 °С до +155 °С", Фамилия=Жернаков
R2: library part r0071, "=Описание", HelpURL=https://www.yageo.com/upload/media/product/productsearch/datasheet/rchip/PYu-RC_Group_51_RoHS_L_11.pdf, ID=r0071, Корпус=0603, Наименование=RC0603FR-07620RL, Номинал=620, Номинальное напряжение="75 В", Номинальный ток="1 А", Описание="Резистор чип 0603 620 Ом ±1 % 0,1 Вт", Отклонение="±1 %", Примечание="Ряд E24", Производитель="YAGEO Corp.", Рабочие температуры="от –55 °С до +155 °С", Фамилия=Паньков
R3 R12: library part r0076, "=Описание", HelpURL=https://www.yageo.com/upload/media/product/productsearch/datasheet/rchip/PYu-RC_Group_51_RoHS_L_11.pdf, ID=r0076, Корпус=0603, Наименование=RC0603FR-071KL, Номинал="1 к", Номинальное напряжение="75 В", Номинальный ток="1 А", Описание="Резистор чип 0603 1 кОм ±1 % 0,1 Вт", Отклонение="±1 %", Примечание="Ряд E24", Производитель="YAGEO Corp.", Рабочие температуры="от –55 °С до +155 °С", Фамилия=Ларионов
R4: library part r0170, "=Описание", HelpURL=https://www.yageo.com/upload/media/product/productsearch/datasheet/rchip/PYu-RC_Group_51_RoHS_L_11.pdf, ID=r0170, Корпус=0603, Наименование=RC0603FR-07750KL, Номинал="750 к", Номинальное напряжение="75 В", Номинальный ток="1 А", Описание="Резистор чип 0603 750 кОм ±1 % 0,1 Вт", Отклонение="±1 %", Примечание="Ряд E24", Производитель="YAGEO Corp.", Рабочие температуры="от –55 °С до +155 °С", Фамилия=Паньков
R5: library part r0110, "=Описание", HelpURL=https://www.yageo.com/upload/media/product/productsearch/datasheet/rchip/PYu-RC_Group_51_RoHS_L_11.pdf, ID=r0110, Корпус=0603, Наименование=RC0603FR-0713KL, Номинал="13 к", Номинальное напряжение="75 В", Номинальный ток="1 А", Описание="Резистор чип 0603 13 кОм ±1 % 0,1 Вт", Отклонение="±1 %", Примечание="Ряд E24", Производитель="YAGEO Corp.", Рабочие температуры="от –55 °С до +155 °С", Фамилия=Жернаков
R6: library part r0123, "=Описание", HelpURL=https://www.yageo.com/upload/media/product/productsearch/datasheet/rchip/PYu-RC_Group_51_RoHS_L_11.pdf, ID=r0123, Корпус=0603, Наименование=RC0603FR-0733KL, Номинал="33 к", Номинальное напряжение="75 В", Номинальный ток="1 А", Описание="Резистор чип 0603 33 кОм ±1 % 0,1 Вт", Отклонение="±1 %", Примечание="Ряд E24", Производитель="YAGEO Corp.", Рабочие температуры="от –55 °С до +155 °С", Фамилия=Паньков
R7: library part r0129, "=Описание", HelpURL=https://www.yageo.com/upload/media/product/productsearch/datasheet/rchip/PYu-RC_Group_51_RoHS_L_11.pdf, ID=r0129, Корпус=0603, Наименование=RC0603FR-0747KL, Номинал="47 к", Номинальное напряжение="75 В", Номинальный ток="1 А", Описание="Резистор чип 0603 47 кОм ±1 % 0,1 Вт", Отклонение="±1 %", Примечание="Ряд E24", Производитель="YAGEO Corp.", Рабочие температуры="от –55 °С до +155 °С", Фамилия=Паньков
R8: library part r0019, "=Описание", HelpURL=https://www.yageo.com/upload/media/product/productsearch/datasheet/rchip/PYu-RC_Group_51_RoHS_L_11.pdf, ID=r0019, Корпус=0603, Наименование=RC0603FR-075K1L, Номинал="5,1 к", Номинальное напряжение="75 В", Номинальный ток="1 А", Описание="Резистор чип 0603 5,1 кОм ±1 % 0,1 Вт", Отклонение="±1 %", Производитель="YAGEO Corp.", Рабочие температуры="от -55 °С до +155 °С", Фамилия=Жернаков
R9: library part r0043, "=Описание", HelpURL=https://www.yageo.com/upload/media/product/productsearch/datasheet/rchip/PYu-RC_Group_51_RoHS_L_11.pdf, ID=r0043, Корпус=0603, Наименование=RC0603FR-0747RL, Номинал=47, Номинальное напряжение="75 В", Номинальный ток="1 А", Описание="Резистор чип 0603 47 Ом ±1 % 0,1 Вт", Отклонение="±1 %", Примечание="Ряд E24", Производитель="YAGEO Corp.", Рабочие температуры="от –55 °С до +155 °С", Фамилия=Паньков
R10: library part r0085, "=Описание", HelpURL=https://www.yageo.com/upload/media/product/productsearch/datasheet/rchip/PYu-RC_Group_51_RoHS_L_11.pdf, ID=r0085, Корпус=0603, Наименование=RC0603FR-072K2L, Номинал="2,2 к", Номинальное напряжение="75 В", Номинальный ток="1 А", Описание="Резистор чип 0603 2,2 кОм ±1 % 0,1 Вт", Отклонение="±1 %", Примечание="Ряд E24", Производитель="YAGEO Corp.", Рабочие температуры="от –55 °С до +155 °С", Фамилия=Паньков
R11: library part r0135, "=Описание", HelpURL=https://www.yageo.com/upload/media/product/productsearch/datasheet/rchip/PYu-RC_Group_51_RoHS_L_11.pdf, ID=r0135, Корпус=0603, Наименование=RC0603FR-0762KL, Номинал="62 к", Номинальное напряжение="75 В", Номинальный ток="1 А", Описание="Резистор чип 0603 62 кОм ±1 % 0,1 Вт", Отклонение="±1 %", Примечание="Ряд E24", Производитель="YAGEO Corp.", Рабочие температуры="от –55 °С до +155 °С", Фамилия=Паньков
R13: library part r0056, "=Описание", HelpURL=https://www.yageo.com/upload/media/product/productsearch/datasheet/rchip/PYu-RC_Group_51_RoHS_L_11.pdf, ID=r0056, Корпус=0603, Наименование=RC0603FR-07150RL, Номинал=150, Номинальное напряжение="75 В", Номинальный ток="1 А", Описание="Резистор чип 0603 150 Ом ±1 % 0,1 Вт", Отклонение="±1 %", Примечание="Ряд E24", Производитель="YAGEO Corp.", Рабочие температуры="от –55 °С до +155 °С", Фамилия=Паньков
R14 R17: library part r0014, "=Описание", HelpURL=https://www.yageo.com/upload/media/product/productsearch/datasheet/rchip/PYu-RC_Group_51_RoHS_L_11.pdf, ID=r0014, Корпус=0603, Наименование=RC0603FR-0710K2L, Номинал="10,2 к", Номинальное напряжение="75 В", Номинальный ток="1 А", Описание="Резистор чип 0603 10,2 кОм ±1 % 0,1 Вт", Отклонение="±1 %", Производитель="YAGEO Corp.", Рабочие температуры="от -55 °С до +155 °С", Фамилия=Жернаков
R15: library part r0072, "=Описание", HelpURL=https://www.yageo.com/upload/media/product/productsearch/datasheet/rchip/PYu-RC_Group_51_RoHS_L_11.pdf, ID=r0072, Корпус=0603, Наименование=RC0603FR-07680RL, Номинал=680, Номинальное напряжение="75 В", Номинальный ток="1 А", Описание="Резистор чип 0603 680 Ом ±1 % 0,1 Вт", Отклонение="±1 %", Примечание="Ряд E24", Производитель="YAGEO Corp.", Рабочие температуры="от –55 °С до +155 °С", Фамилия=Паньков
R16: library part r0017, "=Описание", HelpURL=https://www.yageo.com/upload/media/product/productsearch/datasheet/rchip/PYu-RC_Group_51_RoHS_L_11.pdf, ID=r0017, Корпус=0603, Наименование=RC0603BR-0753K6L, Номинал="53,6 к", Номинальное напряжение="75 В", Номинальный ток="1 А", Описание="Резистор чип 0603 53,6 кОм ±0,1 % 0,1 Вт", Отклонение="±0,1 %", Производитель="YAGEO Corp.", Рабочие температуры="от -55 °С до +155 °С", Фамилия=Жернаков
S1: library part s0001, "=Описание", HelpURL=https://www.te.com/usa-en/product-4-1437565-1.html, ID=s0001, Количество контактов=4, Корпус="6,00 x 6,00 x 4,98", Наименование=FSM4JSMA, Описание="Тактовая кнопка поверхностного монтажа", Производитель="TE Connectivity", Промывка=Запрещена, Рабочие температуры="от –35 °С до +85 °С", Сопротивление контакта="100 мОм", Ток нагрузки="50 мА @ 24 В", Фамилия=Паньков
VD1: library part vd0016, "=Описание", HelpURL=https://www.vishay.com/product?docid=85161, ID=vd0016, Корпус=DO-219AB, Наименование=BZD17C15P, Номинальное напряжение стабилизации="15 В", Номинальный ток стабилизации="50 мА", Описание="Стабилитрон 15 В", Производитель="Vishay Intertechnology, Inc.", Рабочие температуры="от –55 °С до +150 °С", Разброс напряжения стабилизации="13,8...15,6 В", Фамилия=Жернаков
VD2 VD4 VD5 VD6: library part vd0005, "=Описание", HelpURL=https://www.vishay.com/product?docid=88751, ID=vd0005, Корпус=DO-214AB, Максимальное обратное напряжение="60 В", Максимальное прямое напряжение="0,75 В", Максимальный прямой ток="3 А", Наименование=SS36-E3/57T, Описание="Диод Шоттки 60 В 3 А", Производитель="Vishay Intertechnology, Inc.", Рабочие температуры="от –55 °С до +150 °С", Фамилия=Жернаков
VD3: library part vd0009, "=Описание", HelpURL=https://www.littelfuse.com/products/tvs-diodes/surface-mount/1_5smc.aspx, ID=vd0009, Корпус=DO-214AB, Наименование=1.5SMC62CA, Описание="Двунаправленная диодная сборка для подавления помех 53 В", Производитель="Littelfuse, Inc.", Фамилия=Ларионов
VT1: library part vt0005, "=Описание", HelpURL=https://www.ti.com/product/CSD19532Q5B, ID=vt0005, Корпус=SON-8, Наименование=CSD19532Q5BT, Напряжение затвор — исток="±20 В", Напряжение сток — исток="100 В", Описание="Полевой N-канальный МДП-транзистор 100 В 17 А", Производитель="Texas Instruments Inc.", Рабочие температуры="от –55 °С до +150 °С", Сопротивление сток — исток="5,7 мОм", Ток стока="17 А", Фамилия=Жернаков
X1: library part x0007, "=Описание", Contact_1=+24V, Contact_2=+24V, Contact_3=+24V, Contact_4=GND, Contact_5=GND, Contact_6=GND, HelpURL=https://www.te.com/usa-en/product-4-1775099-1.html, ID=x0007, Наименование=4-1775099-1, Описание="ATX Power 6 pin гнездо прямой", Производитель="TE Connectivity", Фамилия=Жернаков
X2: library part x0032, "=Описание", Contact_1=BTN+, Contact_2=BTN-, HelpURL=http://en.connfly.group/product/xVkr=EusQssAN0gN=Aos=mU+UrVkR9kqEAN0gN0AUCUNB+A, ID=x0032, Наименование=DS1023-1x2SF11, Описание="PBS 2 pin 2,54 мм гнездо прямой", Производитель="Connfly Electronic Co., Ltd.", Фамилия=Паньков
X3: library part x0042, "=Описание", Contact_1=nINT, Contact_2=nKILL, Contact_3=GND, HelpURL=http://en.connfly.group/product/xVkr=EusQssAN0gN=Aos=mU+UrVkR9kqEAN0gN0MUR+g+NB+A, ID=x0042, Наименование=DS1069-3MRW6XA, Описание="CWF 3 pin Type A 2,5 мм вилка угловой", Производитель="Connfly Electronic Co., Ltd.", Фамилия=Паньков
X4 X5 X6: library part x0040, "=Описание", Contact_1=+12V, Contact_2=GND, HelpURL=http://en.connfly.group/product/xVkr=EusQssAN0gN=Aos=mU+UrVkR9kqEAN0gN0MUR+g+NB+A, ID=x0040, Наименование=DS1069-2MRW6XA, Описание="CWF 2 pin Type A 2,5 мм вилка угловой", Производитель="Connfly Electronic Co., Ltd.", Фамилия=Паньков

## Free pads (board coordinates)
  round 6.2 hole 2.7: 2(6,5) 2(6,41) 2(102,5) 2(102,41)

## Via types
v1: diameter 0.6, hole 0.3, Top Layer to Bottom Layer, tented both sides, 143 vias
v2: diameter 0.6, hole 0.3, Top Layer to Bottom Layer, tented top, 8 vias

## Nets (pads, with @x,y where several pads share a name; then routed paths per layer and width w, separated by ;. In a path a pad name is that pad's centre, name@x,y a point inside that pad or via, vN(x,y) a via of type N, cw(c..) or ccw(c..) an arc to the next point about the centre after c; other vN are vias at no path point)
12V_OUT: C17.1 L1.2 R7.2 R13.2 R15.2 X4.1 X5.1 X6.1 | length 16.8
  Top Layer w0.3: 75.2,6.5 76.6,6.5 85.7,15.6 88.2,15.6
24V_IN: C4.1 DD2.1 DD2.2 DD2.3 DD2.6 R2.2 R4.2 VD3.1 X1.1 X1.2 X1.3 | length 6.7
  Top Layer w0.3: R4.2 26,30.9 26.4,31.3 26.4,32.6 ; 29.9,32.8 29.9,31.1 30.325,30.675 DD2.6
+5V: C19.1 L2.2 R3.1 R16.2 | length 62.1
  Top Layer w0.3: R3.1 63.2,12.6 63.5,12.9 v1(63.5,14.4) ; R16.2 82.8,26 85.7,28.9 85.7,33.9 86.9,35.1 89.4,35.1
  Bottom Layer w0.3: v1(63.5,14.4) 63.45,14.45 62.75,14.45 60.6,16.6 60.6,18.9 62.3,20.6 67,20.6 69.8,17.8 71.7,17.8 v1(89.5,35.6)
BOOT1: C18.1 DD4.1 | length 5.4
  Top Layer w0.3: C18.1 65,35.4 64.6,35 63.8,35 63.4,34.6 63.4,34.1 64.075,33.425 65.255,33.425 DD4.1
BOOT2: C15.1 DD3.1 | length 5.3
  Top Layer w0.3: C15.1 64.95,22.95 64.95,22.15 64.6,21.8 63.9,21.8 63.4,21.3 63.4,20.8 63.795,20.405 DD3.1
BTN+: R1.2 X2.1
BUTTON_I\N\T\: DD1.8 R7.1 X3.1 | length 45.5
  Top Layer w0.3: X3.1 v1(44.2,12.3) ; v1(63.9,9.2) 64.575,8.525 64.575,7.73 DD1.8 ; v1(71.7,4.6) R7.1
  Bottom Layer w0.3: v1(44.2,12.3) 45.8,13.9 59.2,13.9 v1(63.9,9.2) 63.9,8.3 64.6,7.6 65.6,7.6 66.4,8.4 66.4,10.1 67.1,10.8 69.1,10.8 70.2,9.7 70.2,6 70.871,5.329 70.971,5.329 v1(71.7,4.6)
BUTTON_K\I\L\L\: DD1.2 X3.2 | length 26.6
  Top Layer w0.3: X3.2 46.75,9.113 46.75,12.25 v1(46.8,12.3) ; v1(64.3,3.67) 64.357,3.613 64.935,3.613 65.275,3.952 DD1.2
  Bottom Layer w0.3: v1(46.8,12.3) 52.978,12.3 61.608,3.67 v1(64.3,3.67)
FB1: DD4.5 R16.1 R17.2 | length 9.3
  Top Layer w0.3: DD4.5 70.728,29.597 72.298,29.597 v1(72.3,29.6)
  Bottom Layer w0.3: v1(72.3,29.6) 74.9,29.6 v1(78.5,26)
FB2: DD3.5 R13.1 R14.2 | length 9.6
  Top Layer w0.3: DD3.5 70.745,16.575 71.924,16.575 72.1,16.399 v1(72.1,15.3)
  Bottom Layer w0.3: v1(72.1,15.3) 72.1,8.881 72.5,8.481 v1(72.5,8.4)
GND: "PWR OUT1.1" C1.2 C2.2 C3.2 C4.2 C5.2 C6.2 C7.2 C8.2 C9.2 C10.2 C11.2 C12.2 C13.2 C14.2 C16.2 C17.2 C19.2 DD1.1 DD1.4 DD2.0 DD2.12 DD3.0 DD3.7 DD4.0 DD4.7 pad.2 R8.2 R9.1 R11.1 R14.1 R17.1 S1.1 VD2.1 VD4.2 VD5.2 VD6.2 VT1.D X1.4 X1.5 X1.6 X2.2 X3.3 X4.2 X5.2 X6.2
  other v1: 2,2 11,2 16,2 32,2 38,2 69,2 73,2 77,2 81,2 85,2 88,2 91,2 94,2 97,2 106,2 97,4 13,5 18,5 23,5 29,5 35,5 79,5 94,5 82,7 97,7 106,7 2,9 6,9 11,9 15,9 20,9 26,9 32,9 38,9 83,9 91,9 59,10 78,10 84,11 30,12 35,12 40,12 55,12 80,12 2,13 8,13 13,13 17,13 82,14 33,15 37,15 42,15 46,15 50,15 54,15 16,17 46,19 51.3,19.1 53.3,19.1 57.8,19.1 59.8,19.1 14,20 52.3,20.1 58.8,20.1 51.3,21.1 53.3,21.1 57.8,21.1 59.8,21.1 46,21.5 52.3,22.1 58.8,22.1 51.3,23.1 53.3,23.1 55.8,23.1 57.8,23.1 59.8,23.1 46,24 21,25 34,26 37,26 90,26 21,28.5 90,30 82,32 84,32 2,33 6,35 82,35 84,35 2,37 11,37 15,37 93,38 98,38 106,38 13,40 18,40 23,40 27,40 45,40 49,40 62,40 96,41 67,42 2,44 10,44 15,44 20,44 25,44 47,44 53,44 58,44 64,44 70,44 76,44 93,44 98,44 106,44
  other v2: 33.5,30 34.6,30 35.5,30 33.8,30.9 34.9,30.9 33.5,31.9 34.5,31.9 35.5,31.9
NetC1_1: C1.1 DD1.5 R1.1 | length 9.7
  Top Layer w0.3: 61.7,5.9 v1(63.2,5.9) ; DD1.5 66.587,7.692 66.587,8.656 67.001,9.07 v1(67.5,9.07)
  Bottom Layer w0.3: v1(63.2,5.9) 65.2,5.9 67.5,8.2 v1(67.5,9.07)
NetC2_1: C2.1 DD1.6 R3.2 | length 10.7
  Top Layer w0.3: 59.5,12.6 59.5,11 60.1,10.4 65.3,10.4 65.964,9.736 65.964,7.719 DD1.6
NetC3_1: C3.1 DD1.3 | length 6.7
  Top Layer w0.3: C3.1 64,1.37 63.3,2.07 63.3,2.47 63.7,2.87 65.107,2.87 65.925,3.688 DD1.3
NetC5_1: C5.1 DD2.10 | length 19.2
  Top Layer w0.3: v1(17.9,36.5) C5.1 ; v1(30,27.2) 30,27.579 30.496,28.075 DD2.10@31.1,28.075
  Bottom Layer w0.3: v1(17.9,36.5) 27.2,27.2 v1(30,27.2)
NetC6_1: C6.1 DD2.13 S1.2 | length 34.1
  Top Layer w0.3: S1.2@31.45,37.76 40.55,37.76 40.58,37.73 43.47,37.73 v1(43.5,37.7) ; DD2.13 37.475,29.3 37.9,29.3 39.1,29.3 40,28.4 v1(40,26.1) 40,23.3 40.3,23 C6.1
  Bottom Layer w0.3: v1(40,26.1) 43.5,29.6 v1(43.5,37.7)
NetC7_1: C7.1 C8.1 C9.1 C12.1 C13.1 DD2.18 DD2.19 DD2.20 DD3.2 DD4.2 VD4.1
NetC10_1: C10.1 DD3.6 R10.2 | length 20.4
  Top Layer w0.3: R10.2 68.8,12.6 68.3,13.1 68.3,13.8 68.9,14.4 72.8,14.4 73.3,13.9 73.3,12.6 74,11.9 74.9,11.9 75.3,12.3 C10.1 74.5,13 74.3,13.2 74.3,14.4 72.6,16.1 72.6,17.5 72.235,17.865 DD3.6
NetC11_1: C11.1 R10.1 | length 9.1
  Top Layer w0.3: R10.1 72.3,12.6 73.6,11.3 78,11.3 78.5,11.8 C11.1
NetC14_1: C14.1 DD4.6 R12.2 | length 15.1
  Top Layer w0.3: DD4.6 70.79,30.8 72.6,30.8 73.65,29.75 C14.1 76,28.6 75.5,28.1 71.4,28.1 70.5,27.2 70.5,26.5 71,26 R12.2
NetC16_1: C16.1 R12.1 | length 9.3
  Top Layer w0.3: R12.1 74.2,26 74.4,26.2 74.4,26.9 74.8,27.3 77.6,27.3 79.5,29.2 C16.1
NetDD1_7: DD1.7 DD3.3 | length 13.9
  Top Layer w0.3: v1(62.5,17.5) 62.581,17.5 62.946,17.865 DD3.3 ; DD1.7 65.287,7.692 65.287,9.158 v1(65.3,9.17)
  Bottom Layer w0.3: v1(62.5,17.5) 65.3,14.7 v1(65.3,9.17)
NetDD2_7: DD2.7 R4.1 R5.2 | length 11.5
  Top Layer w0.3: R4.1 23.25,29.95 23.7,29.5 24.3,29.5 24.75,29.05 R5.2@24.75,28.05 ; R5.2 R5.2@24.75,28.05 ; DD2.7 28.9,30.025 27.175,28.3 25,28.3 R5.2@24.75,28.05
NetDD2_8: DD2.8 R5.1 R6.2 | length 12.4
  Top Layer w0.3: R6.2 23.25,26.55 ; R5.1 23.25,26.55 ; DD2.8 31.575,29.4 29.7,29.4 26.85,26.55 23.25,26.55
NetDD2_9: DD2.9 R6.1 VD3.2 VT1.S | length 8.4
  Top Layer w0.3: R6.1 26.193,25.1 29.793,28.7 31.575,28.7 DD2.9
NetDD2_11: DD2.11 R8.1 | length 11.7
  Top Layer w0.3: DD2.11 38.725,28.075 39.2,27.6 39.2,19.8 39.9,19.1 40.65,19.1 R8.1
NetDD3_4: DD3.4 R9.2
NetDD4_4: DD4.4 R11.2
"NetPWR OUT1_2": "PWR OUT1.2" R15.1
NetR2_1: R2.1 VD1.1 VT1.G | length 37.9
  Top Layer w0.3: VD1.1 27.5,16 27.5,14.6 28.1,14 28.9,14 30.25,15.35 30.25,16.05 v1(30.3,16.1) 30.3,19.3 30.6,19.6 31.725,19.6 VT1.G ; R2.1 v1(28,38.2)
  Bottom Layer w0.3: v1(28,38.2) 28,31.5 31.6,27.9 31.6,17.4 v1(30.3,16.1)
NetVD1_2: VD1.2 VD2.2
SW1: C18.2 DD4.8 L2.1 VD6.1 | length 9
  Top Layer w0.3: C18.2 v1(65,39.5)
  Bottom Layer w0.3: v1(65,39.5) 67.3,39.5 v1(70.8,36)
SW2: C15.2 DD3.8 L1.1 VD5.1 | length 12.3
  Top Layer w0.3: C15.2 v1(65,26.4)
  Bottom Layer w0.3: v1(65,26.4) 70.9,20.5 v1(73,20.5)
pads on no net: DD2.4 DD2.5 DD2.14 DD2.15 DD2.16 DD2.17 DD4.3

## Polygon pours and split planes (outlines as drawn)
NetDD2_9 on Top Layer "Top Layer-NetDD1_9" (solid, pour order 4): 13.7,21.8 30.7,21.8 30.7,20.3 32.8,20.3 32.8,29 30.8,29 30.8,28.4 32.5,28.4 32.5,27.3 30.7,27.3 30.7,23.2 18.1,23.2 18.1,28.9 13.7,28.9
GND on Top Layer "Top Layer-GND" (solid, pour order 48): 0,46 108,46 108,0 0,0
NetC7_1 on Top Layer "Top Layer-NetC2_1" (solid, pour order 20): 36.3,32.35 41.05,32.35 40.9,31 49.5,31 49.5,23.9 61.4,23.9 61.4,18.5 66.3,18.5 66.3,19.801 62.7,19.801 62.7,25.6 61.796,26.234 61.796,31.4 66.3,31.4 66.3,32.8 61.796,32.8 61.796,35.7 49.8,35.7 40.9,35.7 40.9,34.5 36.3,34.5
24V_IN on Top Layer "Top Layer-24V_IN" (solid, pour order 2): 6.5,16 6.5,30.5 10.75,34.75 26,34.75 26.5,34.25 30.05,34.25 30.5,34.5 32.7,34.5 32.7,32.4 30.2,32.4 21.1,32.4 18.8,30.1 11.9,30.1 11.9,16.1 6.6,16.1
12V_OUT on Top Layer "Top Layer-12V_OUT 1" (solid, pour order 46): 74.7,9.3 76.1,9.3 76.1,3.8 74.7,3.8
"NetPWR OUT1_2" on Top Layer "Top Layer-NetPWR OUT1_2" (solid, pour order 44): 86.7,13.2 88.5,13.2 88.5,9.3 86.7,9.3
12V_OUT on Top Layer "Top Layer-12V_OUT" (solid, pour order 42): 87.1,22.6 92.8,22.6 92.8,32 95.4,32 99.9,32 99.9,29.2 95.4,29.2 95.4,22.6 99.9,22.6 99.9,19.7 95.4,19.7 95.4,13.05 99.9,13.05 99.9,10 92.8,10 92.8,19.7 91.5,19.7 91.5,16.322 92,15.822 92,13.4 86.7,13.4 86.7,16 87.1,16.4
FB2 on Top Layer "Top Layer-FB2" (solid, pour order 40): 70.5,9.3 70.5,7.5 74.5,7.5 74.5,9.3
NetDD3_4 on Top Layer "Top Layer-NetDD3_4" (solid, pour order 38): 64,17.3 66.3,17.3 66.3,14.1 66,13.8 66,11.6 64,11.6
NetDD4_4 on Top Layer "Top Layer-NetDD4_4" (solid, pour order 36): 66,30.3 64.1,30.3 64.1,28.5 65.1,28.5 66.9,26.7 66.9,25.2 68.5,25.2 68.5,27.8
SW2 on Top Layer "Top Layer-SW2" (solid, pour order 34): 69.9,19.7 74.2,19.7 75.3,20.6 80.6,20.6 80.6,18.2 86,18.2 86,22.9 80.7,22.9 80.7,24.6 73.6,24.6 73.6,22.1 72.4,21.2 69.9,21.2
no net on Top Layer "Top Layer-No Net" (solid, pour order 32): 92.7,37
+5V on Top Layer "Top Layer-+5V" (solid, pour order 30): 87.2,42.3 91.5,42.3 91.5,36.664 90.3,35.682 90.3,33.3 88.7,33.3 88.6,33.4 88.6,35.6 87.2,36.5
FB1 on Top Layer "Top Layer-FB1" (solid, pour order 26): 76.5,25.2 80.6,25.2 80.6,26.8 76.5,26.8
no net on Top Layer "Top Layer-No Net 1" (solid, pour order 24): 74.6,37.1
SW1 on Top Layer "Top Layer-SW1" (solid, pour order 22): 72,37.6 80.3,37.6 86.4,37.6 86.4,42.6 81,42.6 79.9,41.5 74.6,41.5 69.6,38.583 69.6,32.7 72,32.7
NetC2_1 on Top Layer "Top Layer-NetC2_1 1" (solid, pour order 18): 57.5,11.8 57.5,13.4 61.4,13.4 61.4,11.8
NetC1_1 on Top Layer "Top Layer-NetC1_1" (solid, pour order 10): 60.9,7.67 62.5,7.67 62.5,3.87 62.3,3.87 60.9,3.87
BTN+ on Top Layer "Top Layer-BTN+" (solid, pour order 12): 55.5,5.07 58.6,5.07 58.6,3.67 62.5,3.67 62.5,2.37 55.5,2.37
NetVD1_2 on Top Layer "Top Layer-NetVD1_2" (solid, pour order 8): 18.8,20.4 18.8,15.7 23.55,15.7 26.55,17.7 28.8,17.7 28.8,20.4
no net on Bottom Layer "Bottom Layer-No Net" (solid, pour order 52): 0,-1
GND on Bottom Layer "Bottom Layer-GND" (solid, pour order 50): 0,46 108,46 108,0 107,0 0,0

## Silkscreen, mask and mechanical layers (free items; w line width, h text height)
Top Overlay:
  text ".designation" at 16,2 h2
Bottom Overlay:
  text ".pcb_dec_number" at 32,2 h2
Board:
  the board outline again, w0.1
Assembly Notes (Mech5):